# EAGLE board _HC_Thesis_PCB.92a26f0b-b337-44cd-ba37-0ec76b757aee_LV1 (EAGLE 9.7.0)
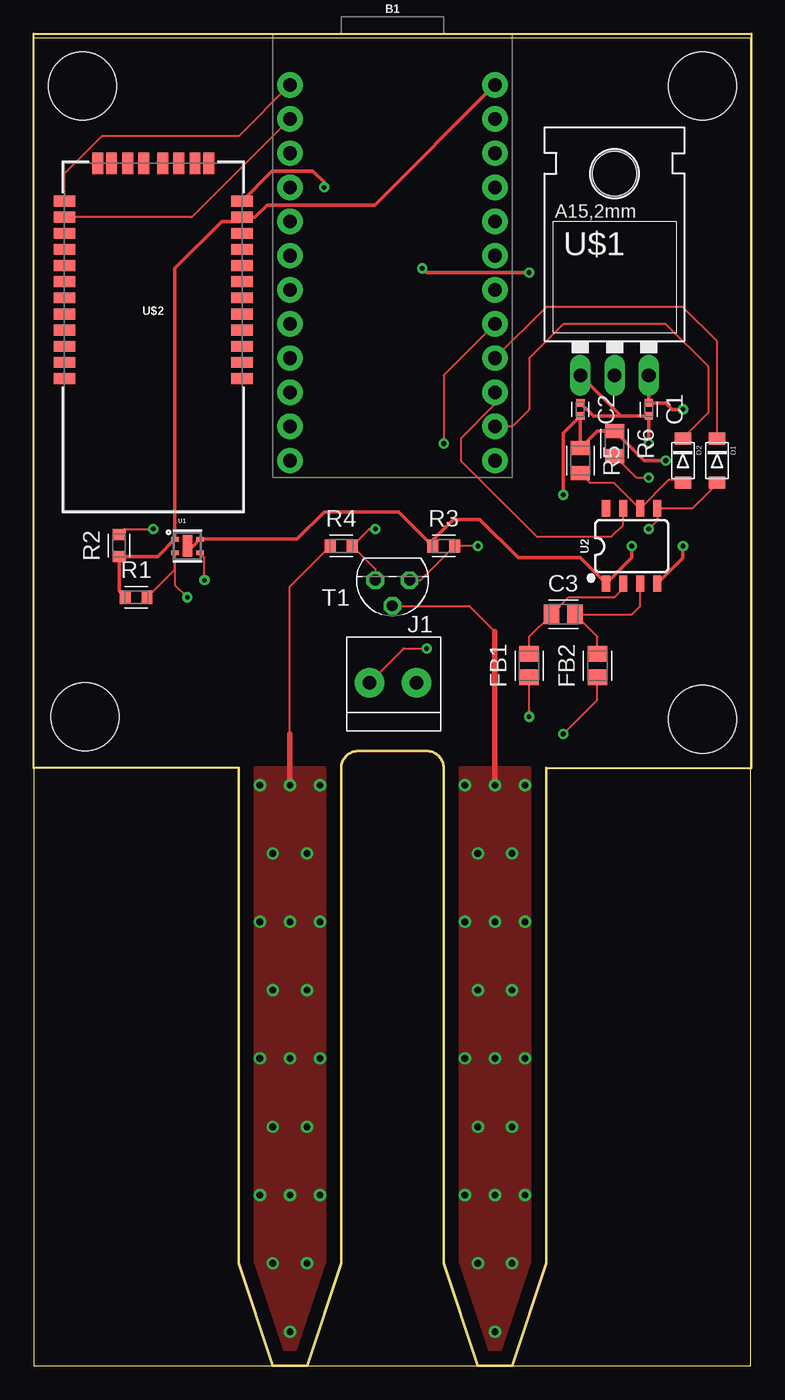
[diagram p0: board, top side]
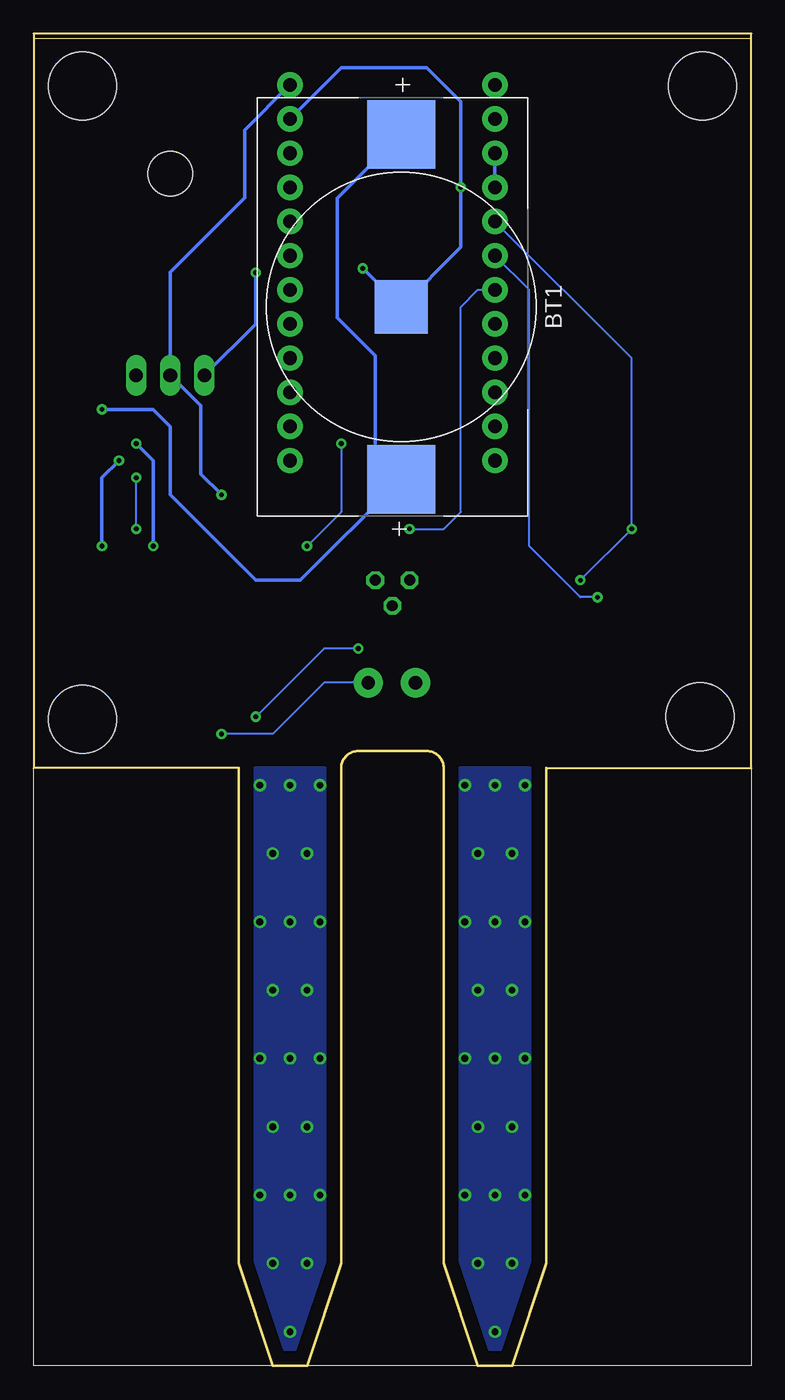
[diagram p1: board, bottom side, seen from below]

Size 53.34 x 99.06 mm. Coordinates in mm from the lower left corner, seen from the top.
Outline: 0,44.45 0,98.73 53.32,98.73 53.32,0 0,0 0,44.45
Outline: 0,44.45 15.24,44.45 15.24,7.62 17.78,0 20.32,0 22.86,7.62 22.86,44.45 arc-90 24.13,45.72 29.21,45.72 arc-90 30.48,44.45 30.48,7.62 33.02,0 35.56,0 38.1,7.62 38.1,44.45 53.34,44.45 53.34,99.06 0,99.06 0,44.45
Copper layers (1*16): Top 0.035mm / dielectric 1.5mm / Bottom 0.035mm
Design rules "default": minimum track width 6mil, minimum drill 0.35mm, track to track 6mil, track to pad 6mil, pad to pad 6mil, via to via 6mil, smd to smd 6mil, copper to edge 40mil, drill to drill 6mil, minimum pad ring 10mil, minimum via ring 8mil, stop-mask expansion 4mil, vias tented up to drill 0mil, thermal gap 10mil
Holes 5.08 mm at 3.63,95.17 49.71,95.17 49.71,48.08 3.81,48.26

## Footprints (pad centres in the part's own frame; a part is rotated, then mirrored left to right if it is on the bottom)
SPARKFUN_PRO_MICRO = drill 1.016 pad 1.88: 1 -7.62,12.7; 2 -7.62,10.16; 3 -7.62,7.62; 4 -7.62,5.08; 5 -7.62,2.54; 6 -7.62,0; 7 -7.62,-2.54; 8 -7.62,-5.08; 9 -7.62,-7.62; 10 -7.62,-10.16; 11 -7.62,-12.7; 12 -7.62,-15.24; 13 7.62,-15.24; 14 7.62,-12.7; 15 7.62,-10.16; 16 7.62,-7.62; 17 7.62,-5.08; 18 7.62,-2.54; 19 7.62,0; 20 7.62,2.54; 21 7.62,5.08; 22 7.62,7.62; 23 7.62,10.16; 24 7.62,12.7
BAT_3002 = smd 3.96 x 3.96: N 0,0.65 | smd 5.08 x 5.08: P 12.825,0.65; P1 -12.825,0.65
CAPC1005X60 = smd 0.56 x 0.629: 1 -0.485,0; 2 0.485,0
CAPC2012X110 = smd 1.165 x 1.465: 1 -0.875,0; 2 0.875,0
SOD-123FL = smd 0.91 x 1.22: A 1.637,0; C -1.637,0
BEADC2012X105N = smd 1.165 x 1.465: 1 -0.875,0; 2 0.875,0
1X2-3.5MM = drill 1 pad 2.184: 1 1.8,0; 2 -1.7,0
RESC1608X60 = smd 0.799 x 0.974: 1 -0.815,0; 2 0.815,0
RESC2012X65 = smd 1.031 x 1.42: 1 -0.919,0; 2 0.919,0
TO92 = drill 0.813 octagon: 1 1.27,0; 2 0,1.905; 3 -1.27,0
SHTC3 = smd 0.55 x 0.35: 1 -0.925,0.5; 2 -0.925,-0.5; 3 0.925,-0.5; 4 0.925,0.5 | smd 0.7 x 1.6: 5 0,0
SO08 = smd 0.6 x 1.2: 1 -1.905,-2.8; 2 -0.635,-2.8; 3 0.635,-2.8; 4 1.905,-2.8; 5 1.905,2.8; 6 0.635,2.8; 7 -0.635,2.8; 8 -1.905,2.8
78XXL = drill 1.016 long: GND 0,-3.81; IN -2.54,-3.81; OUT 2.54,-3.81 | hole 3.302: 0,11.176
RN41 = smd 0.8 x 1.6: 1 -6.6,-6.6; 2 -5.4,-6.6; 3 -4.2,-6.6; 4 -3,-6.6; 5 -1.8,-6.6; 6 -0.6,-6.6; 7 0.6,-6.6; 8 1.8,-6.6; 9 3,-6.6; 10 4.2,-6.6; 11 5.4,-6.6; 12 6.6,-6.6; 13 6.6,6.6; 14 5.4,6.6; 15 4.2,6.6; 16 3,6.6; 17 1.8,6.6; 18 0.6,6.6; 19 -0.6,6.6; 20 -1.8,6.6; 21 -3,6.6; 22 -4.2,6.6; 23 -5.4,6.6; 24 -6.6,6.6 | smd 1.6 x 0.8: 28 9.4,3.1; 29 9.4,-3.1; 30 9.4,4.122; 31 9.4,1.9; 32 9.4,0.7; 33 9.4,-0.7; 34 9.4,-1.9; 35 9.4,-4.122

## Placement (x,y rotation side)
B1  SPARKFUN_PRO_MICRO  [SPARKFUN_PRO_MICRO]  26.67,82.55 0 top
BT1  CR2032 - 3V  [BAT_3002]  26.67,78.74 270 bottom
C1  100nF  [CAPC1005X60]  45.72,71.12 270 top
C2  10uF  [CAPC1005X60]  40.64,71.12 270 top
C3  0.01uF  [CAPC2012X110]  39.37,55.88 0 top
D1  1N4148  [SOD-123FL]  50.8,67.31 270 top
D2  1N4148  [SOD-123FL]  48.26,67.31 270 top
FB1  FERRITE_BEAD  [BEADC2012X105N]  36.83,52.07 90 top
FB2  FERRITE_BEAD  [BEADC2012X105N]  41.91,52.07 90 top
J1  1X2-3.5MM  [1X2-3.5MM]  26.67,50.8 0 top
R1  2200  [RESC1608X60]  7.62,57.15 0 top
R2  2200  [RESC1608X60]  6.35,61 90 top
R3  10k  [RESC1608X60]  30.48,60.96 0 top
R4  100  [RESC1608X60]  22.86,60.96 0 top
R5  [RESC2012X65]  40.64,67.31 270 top
R6  [RESC2012X65]  43.18,68.58 270 top
T1  2N3904  [TO92]  26.67,58.42 180 top
U1  SHTC3  [SHTC3]  11.43,60.96 0 top
U2  MAX31855K  [SO08]  44.45,60.96 0 top
U$1  V_REG_LD1117VXX  [78XXL]  43.18,77.47 0 top
U$2  BLUETOOTH-RN-41"  [RN41]  8.89,80.01 90 top

## Library data of the parts
B1 = SparkFun-Boards
BT1 = Battery_Holder; CATEGORY: Battery-Holder; CELL_DIAMETER: 20mm; DESCRIPTION: Battery Retainer Coin, 20.0mm 1 Cell SMD (SMT) Tab; MANUFACTURER: Keystone Electronics; MPN: 3002; PART_STATUS: ACTIVE; ROHS_COMPLIANT: COMPLIANT; SERIES: -; SUB_CATEGORY: Holder; TYPE: Coin Cell
C1-C3 = Capacitor; CATEGORY: Capacitor
D1 D2 J1 = adafruit
FB1 FB2 = Filter; CATEGORY: Filter; SUB-CATEGORY: Ferrite bead
R1-R6 = Resistor; CATEGORY: Resistor; SUB-CATEGORY: Fixed
T1 = transistor
U1 = SparkFun-Sensors; PROD_ID: IC-14840
U2 = SparkFun-IC-Conversion; PROD_ID: IC-12578
U$1 = SparkFun-IC-Power
U$2 = SparkFun-RF; PROD_ID: IC-11844; SF_ID: WRL-12575

## Nets
3.3V: B1.24 C2.2 R1.1 R2.1 R5.1 R6.1 U1.1 U2.4 U$1.GND U$2.11
3.7V: BT1.P BT1.P1 C1.1 U$1.OUT
GND: B1.3 B1.4
GND_MAIN: B1.23 BT1.N C1.2 C2.1 R3.1 U1.4 U1.5 U2.1 U$1.IN U$2.12
N$4: C3.1 FB1.2 U2.2
N$5: B1.1 U$2.13
N$6: B1.2 U$2.14
N$7: B1.7 R4.2 T1.1
N$8: B1.17 R3.2 T1.3
N$9: C3.2 FB2.2 U2.3
N$10: B1.5 R2.2 U1.3
N$11: B1.6 R1.2 U1.2
N$12: D2.A R5.2 U2.6
N$13: D1.A R6.2 U2.5
N$14: B1.15 U2.7
N$15: B1.16 D1.C
N$16: B1.14 D2.C
N$17: FB1.1 J1.2
N$18: FB2.1 J1.1
PROBE1: T1.2
PROBE2: R4.1
VCC: B1.21

## Tracks (layer width: path | path; a pad name or v marks a point on that pad's centre or on a via)
3.3V  (via drill 0.35)
  Top 0.152: U$2.11 15.49,85.34 15.24,85.09
  Top 0.254: R1.1 6.35,57.6 R2.1 9.23,60.19 U1.1 10.5,81.62 13.97,85.09 15.24,85.09 | v39.37,64.77 39.37,69.36 C2.2 R5.1 41.91,69.5 R6.1 45.37,67.31 v46.99,67.31 | v48.26,60.96 48.26,60.07 U2.4 | U$2.11 16.45,85.41 17.35,86.31 25.35,86.31 B1.24
  Bottom 0.254: v46.99,67.31 48.26,66.04 v48.26,60.96 | B1.24 37.64,91.9 37.64,86.88 43.18,81.34 U$1.GND 40.92,71.4 40.92,66.32 v39.37,64.77
3.7V  (via drill 0.35)
  Top 0.254: U$1.OUT C1.1 46.99,71.6 47.48,71.12 v48.26,71.12
  Bottom 0.152: 27.94,67.83 27.94,66.04 | BT1.P 27.04,66.94 | BT1.P 26.28,65.65 | BT1.P 27.94,67.83 | 27.94,67.83 27.94,68.58
  Bottom 0.254: 27.94,68.58 27.94,75.11 30.77,77.94 30.77,86.82 BT1.P1 | 26.28,65.65 33.52,58.42 36.83,58.42 43.18,64.77 43.18,69.85 44.45,71.12 v48.26,71.12
GND
  Bottom 0.254: B1.4 B1.3
GND_MAIN  (via drill 0.35)
  Top 0.152: v21.59,87.63 21.59,88.01 | 29.67,61.41 R3.1 | 29.21,81.28 v28.89,81.6
  Top 0.254: U1.5 11.86,60.96 U1.4 19.55,61.46 21.59,63.5 27.12,63.5 R3.1 | C1.2 43.67,70.63 U$1.IN | U$2.12 17.68,88.8 17.73,88.85 20.75,88.85 21.59,88.01 | 29.67,61.41 31.2,62.95 33.14,62.95 36,60.09 40.62,60.09 U2.1 43.24,58.85 43.24,58.88 44.45,60.09 v44.45,60.96 | v36.83,81.28 29.21,81.28 | C1.2 v45.72,68.58 | C2.1 41.05,71.19 41.07,71.19 41.63,70.63 C1.2
  Bottom 0.254: B1.23 30.48,96.52 24.13,96.52 21.59,93.98 v21.59,87.63 21.59,83.17 BT1.N v28.89,81.6 | U$1.IN 36.83,77.47 v36.83,81.28 | v44.45,60.96 44.45,67.31 v45.72,68.58
N$4
  Top 0.152: FB1.2 36.83,54.22 C3.1 39.77,57.15 43.18,57.15 43.81,57.79 U2.2
N$5
  Top 0.152: B1.1 15.24,91.44 5.08,91.44 2.29,88.65 U$2.13
N$6
  Top 0.152: B1.2 11.75,85.41 U$2.14
N$7  (via drill 0.35)
  Top 0.152: T1.1 25.4,59.24 R4.2 24.94,62.23 v25.4,62.23
  Bottom 0.152: v25.4,62.23 22.86,62.23 21.59,63.5 21.59,78.74 20.32,80.01 B1.7
N$8  (via drill 0.35)
  Top 0.152: T1.3 28.75,58.42 R3.2 v33.02,60.96 | B1.17 30.48,73.66 v30.48,68.58
  Bottom 0.152: v30.48,68.58 30.48,63.5 v33.02,60.96
N$9
  Top 0.152: FB2.2 41.91,54.22 C3.2 44.45,55.88 45.09,56.52 U2.3
N$10  (via drill 0.35)
  Top 0.152: R2.2 6.76,62.23 v8.89,62.23 | v12.7,58.42 12.7,60.12 U1.3
  Bottom 0.152: v12.7,58.42 v8.89,62.23 8.89,74.93 B1.5
N$11  (via drill 0.35)
  Top 0.152: R1.2 10.5,59.22 U1.2 10.5,58.07 v11.43,57.15
  Bottom 0.152: v11.43,57.15 12.7,57.15 16.51,60.96 16.51,80.01 B1.6
N$12
  Top 0.152: D2.A 48.07,65.86 47.18,65.86 U2.6 45.04,63.76 43.15,65.65 41.38,65.65 R5.2
N$13  (via drill 0.35)
  Top 0.152: D1.A 50.8,65.59 48.97,63.76 U2.5 46.36,62.87 v45.72,62.23 | v45.72,66.04 44.8,66.04 R6.2
  Bottom 0.152: v45.72,62.23 v45.72,66.04
N$14
  Top 0.152: B1.15 34.29,71.5 31.75,68.96 31.75,67.31 37.4,61.66 42.94,61.66 43.81,62.54 U2.7
N$15
  Top 0.152: D1.C 50.8,76.2 48.26,78.74 38.1,78.74 B1.16
N$16
  Top 0.152: B1.14 35.56,69.85 36.83,71.12 36.83,74.93 39.37,77.47 46.99,77.47 50.14,74.32 50.14,70.87 48.26,68.99 D2.C
N$17  (via drill 0.35)
  Top 0.152: J1.2 27.51,53.34 v29.21,53.34 | v36.83,48.26 FB1.1
  Bottom 0.152: v29.21,53.34 31.75,53.34 v36.83,48.26
N$18  (via drill 0.35)
  Top 0.152: v39.37,46.99 41.91,49.53 FB2.1
  Bottom 0.152: J1.1 31.75,50.8 35.56,46.99 v39.37,46.99
PROBE1  (via drill 0.51)
  Top 0.152: 34.29,54.61 32.39,56.52 T1.2
  Top 0.406: v34.29,43.18 34.29,54.61
  other vias: 34.29,33.02 34.29,22.86 34.29,12.7 33.02,7.62 35.56,7.62 34.29,2.54 33.02,38.1 35.56,38.1 35.56,27.94 33.02,27.94 33.02,17.78 35.56,17.78 36.53,43.18 36.53,33.02 36.53,22.86 36.53,12.7 32.05,12.7 32.05,22.86 32.05,33.02 32.05,43.18
  pour Top: 38.23,44.58 30.35,44.58 30.35,-0.13 38.23,-0.13
  pour Bottom (isolate 0.305): 38.2,44.55 30.38,44.55 30.38,-0.1 38.2,-0.1
PROBE2  (via drill 0.51)
  Top 0.152: 19.05,46.99 19.05,57.96 R4.1
  Top 0.406: v19.05,43.18 19.05,46.99
  other vias: 19.05,33.02 19.05,22.86 19.05,12.7 20.32,7.62 17.78,7.62 19.05,2.54 17.78,17.78 20.32,17.78 17.78,27.94 20.32,27.94 17.78,38.1 20.32,38.1 16.81,43.18 16.81,33.02 16.81,22.86 16.81,12.7 21.29,12.7 21.29,22.86 21.29,33.02 21.29,43.18
  pour Top: 22.99,44.58 15.11,44.58 15.11,-0.13 22.99,-0.13
  pour Bottom: 22.99,44.58 15.11,44.58 15.11,-0.13 22.99,-0.13